# EAGLE board morseovka-panel (EAGLE 9.1.3)
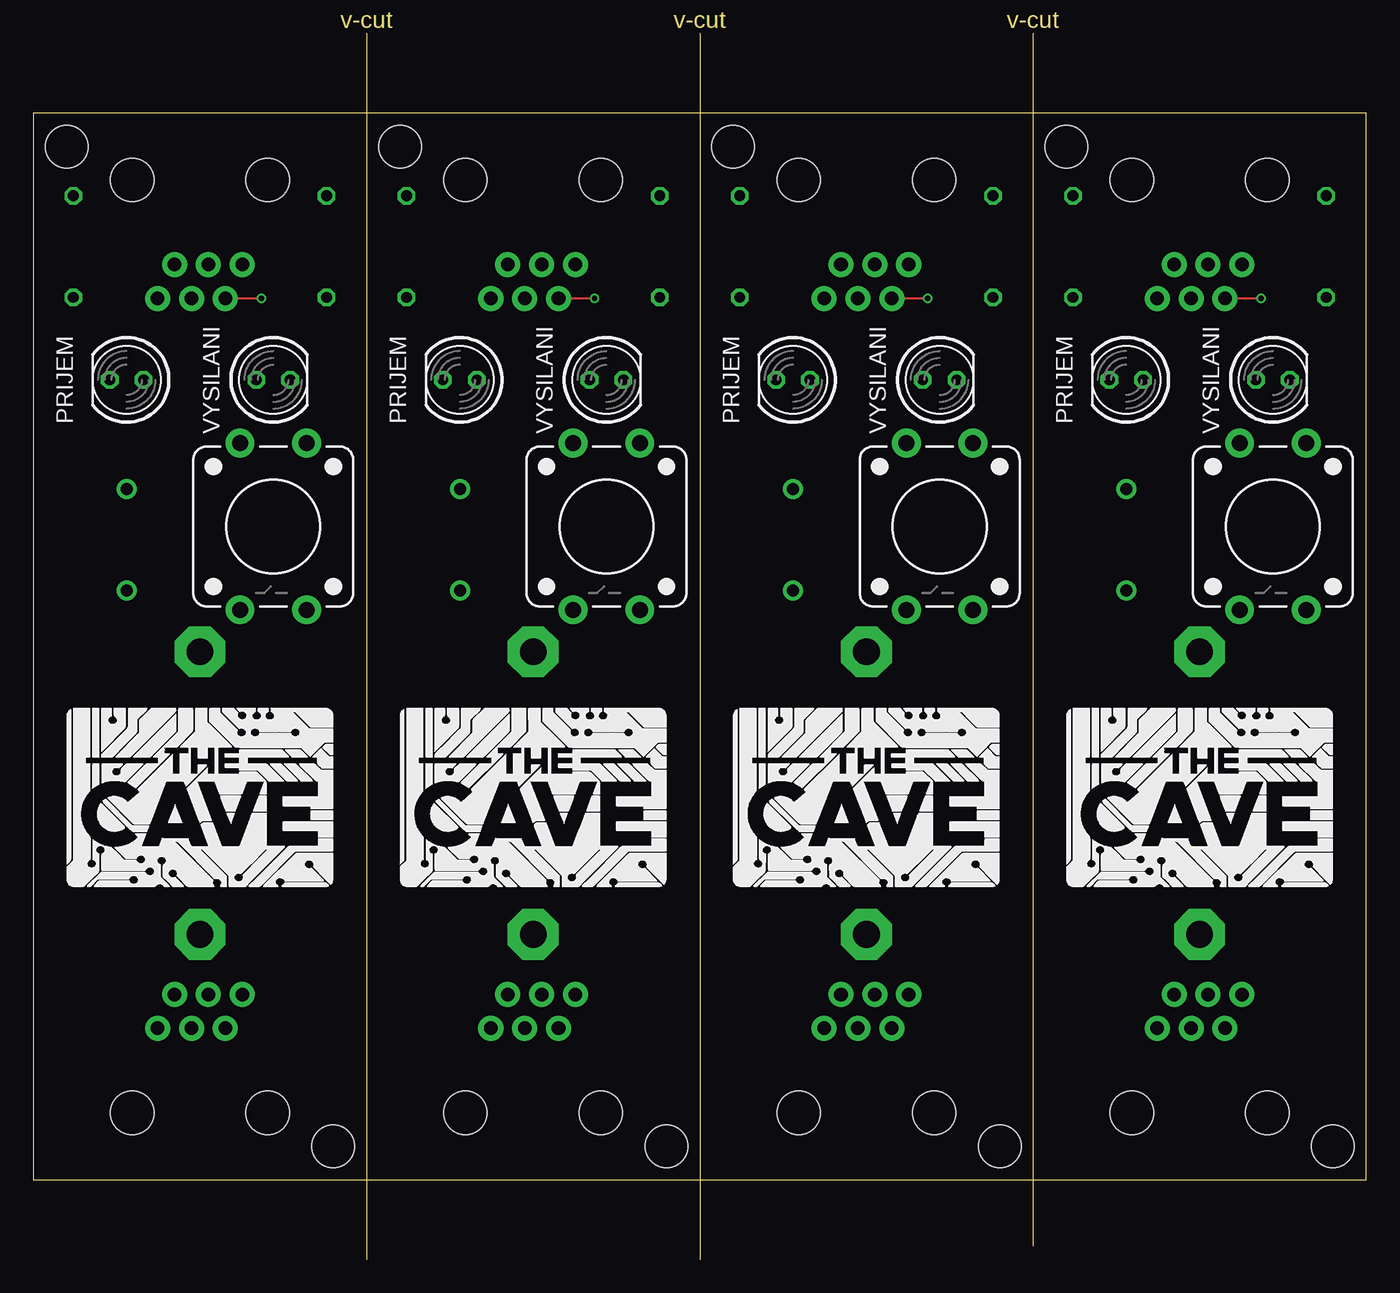
[diagram p0: board, top side]
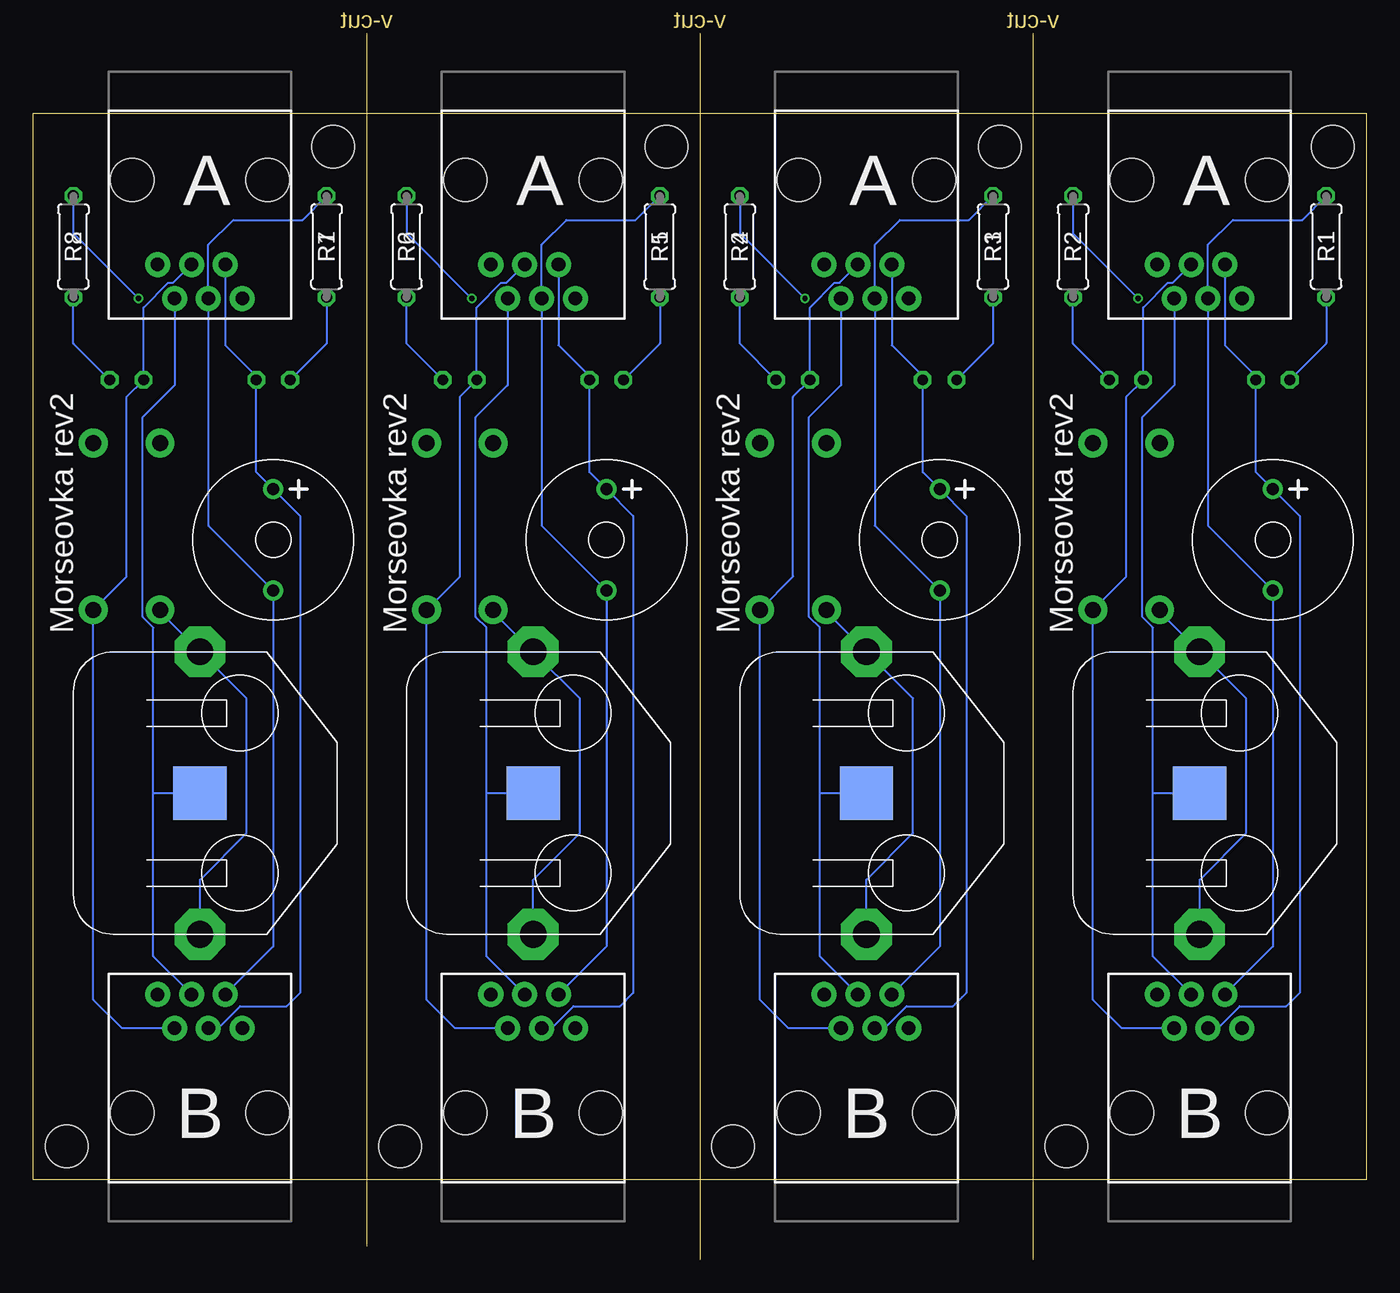
[diagram p1: board, bottom side, seen from below]

Size 100 x 92 mm. Coordinates in mm from the lower left corner, seen from the top.
Outline: 25,92 25,0
Outline: 50,92 50,0
Outline: 75,92 75,1
Outline: 0,86 0,6 25,6 50,6 75,6 100,6 100,86 75,86 50,86 25,86 0,86
Copper layers (1*16): Top 0.035mm / dielectric 1.5mm / Bottom 0.035mm
Design rules "SeeedStudio_2layer_DRU_no_angle_20140221": minimum track width 6mil, minimum drill 12mil, track to track 6mil, track to pad 6mil, pad to pad 6mil, via to via 6mil, smd to smd 0mil, copper to edge 10mil, drill to drill 10mil, minimum pad ring 10mil, minimum via ring 6mil, stop-mask expansion 2mil, vias tented up to drill 100mil, thermal gap 10mil
Holes 3.2 mm at 2.5,83.5 22.5,8.5 27.5,83.5 47.5,8.5 52.5,83.5 72.5,8.5 77.5,83.5 97.5,8.5

## Footprints (pad centres in the part's own frame; a part is rotated, then mirrored left to right if it is on the bottom)
BZ2-7.6-D12.0XH6.5MM = drill 0.9 pad 1.5: + -3.8,0; - 3.8,0
RJ11-6 = drill 1.016 pad 1.88: 1 -3.175,8.89; 2 -1.905,6.35; 3 -0.635,8.89; 4 0.635,6.35; 5 1.905,8.89; 6 3.175,6.35 | hole 3.251: -5.08,0; 5.08,0
LED5MM = drill 0.813 octagon: A -1.27,0; K 1.27,0
0207/7 = drill 0.813 octagon: 1 -3.81,0; 2 3.81,0
TACTILE_SWITCH_PTH_12MM = drill 1.2 pad 2.159: 1 6.25,-2.5; 2 -6.25,-2.5; 3 6.25,2.5; 4 -6.25,2.5
CR2032H = smd 4 x 4: GND 0,0 | drill 2 pad 3.81 octagon: VCC.1 -10.6,0; VCC.2 10.6,0

## Placement (x,y rotation side)
BUZ1  [BZ2-7.6-D12.0XH6.5MM]  7,54 270 bottom
BUZ2  [BZ2-7.6-D12.0XH6.5MM]  32,54 270 bottom
BUZ3  [BZ2-7.6-D12.0XH6.5MM]  57,54 270 bottom
BUZ4  [BZ2-7.6-D12.0XH6.5MM]  82,54 270 bottom
J1  RJ11  [RJ11-6]  12.5,81 180 bottom
J2  RJ11  [RJ11-6]  12.5,11 0 bottom
J3  RJ11  [RJ11-6]  37.5,11 0 bottom
J4  RJ11  [RJ11-6]  37.5,81 180 bottom
J5  RJ11  [RJ11-6]  62.5,11 0 bottom
J6  RJ11  [RJ11-6]  62.5,81 180 bottom
J7  RJ11  [RJ11-6]  87.5,11 0 bottom
J8  RJ11  [RJ11-6]  87.5,81 180 bottom
LED1  PRIJEM  [LED5MM]  7,66 180 top
LED2  VYSILANI  [LED5MM]  18,66 0 top
LED3  PRIJEM  [LED5MM]  32,66 180 top
LED4  VYSILANI  [LED5MM]  43,66 0 top
LED5  PRIJEM  [LED5MM]  57,66 180 top
LED6  VYSILANI  [LED5MM]  68,66 0 top
LED7  PRIJEM  [LED5MM]  82,66 180 top
LED8  VYSILANI  [LED5MM]  93,66 0 top
R1  [0207/7]  3,76 270 bottom
R2  [0207/7]  22,76 270 bottom
R3  [0207/7]  28,76 270 bottom
R4  [0207/7]  47,76 270 bottom
R5  [0207/7]  53,76 270 bottom
R6  [0207/7]  72,76 270 bottom
R7  [0207/7]  78,76 270 bottom
R8  [0207/7]  97,76 270 bottom
S1  [TACTILE_SWITCH_PTH_12MM]  18,55 270 top
S2  [TACTILE_SWITCH_PTH_12MM]  43,55 270 top
S3  [TACTILE_SWITCH_PTH_12MM]  68,55 270 top
S4  [TACTILE_SWITCH_PTH_12MM]  93,55 270 top
U$1  CR2032HSMD  [CR2032H]  12.5,35 90 bottom
U$2  THECAVE_LOGO_NEW_TOP  [NEW_LOGO_TOP]  2.5,28 0 top
U$3  CR2032HSMD  [CR2032H]  37.5,35 90 bottom
U$4  THECAVE_LOGO_NEW_TOP  [NEW_LOGO_TOP]  27.5,28 0 top
U$5  CR2032HSMD  [CR2032H]  62.5,35 90 bottom
U$6  THECAVE_LOGO_NEW_TOP  [NEW_LOGO_TOP]  52.5,28 0 top
U$7  CR2032HSMD  [CR2032H]  87.5,35 90 bottom
U$8  THECAVE_LOGO_NEW_TOP  [NEW_LOGO_TOP]  77.5,28 0 top

## Library data of the parts
BUZ1-BUZ4 = Seeed-Connector; MPN: KS-12065D03YA
J1-J8 = SparkFun-Connectors; PROD_ID: CONN-08590; SF_ID: PRT-00132
LED1-LED8 = led
R1-R8 = rcl
S1-S4 = SparkFun-Switches; PROD_ID: SWCH-09185; SF_SKU: COM-09190
U$1-U$8 = thecave

## Nets
N$1: LED1.K R1.2
N$2: S1.1 U$1.VCC.1 U$1.VCC.2
N$3: LED3.K R3.2
N$4: LED2.K R2.2
N$5: LED4.K R4.2
N$6: S2.1 U$3.VCC.1 U$3.VCC.2
N$7: LED5.K R5.2
N$8: LED6.K R6.2
N$9: S3.1 U$5.VCC.1 U$5.VCC.2
N$10: LED7.K R7.2
N$11: LED8.K R8.2
N$12: S4.1 U$7.VCC.1 U$7.VCC.2
RX+: BUZ1.+ J1.2 J2.4 LED1.A
RX+1: BUZ2.+ J3.4 J4.2 LED3.A
RX+2: BUZ3.+ J5.4 J6.2 LED5.A
RX+3: BUZ4.+ J7.4 J8.2 LED7.A
RX-: BUZ1.- J1.3 J2.5 R1.1
RX-1: BUZ2.- J3.5 J4.3 R3.1
RX-2: BUZ3.- J5.5 J6.3 R5.1
RX-3: BUZ4.- J7.5 J8.3 R7.1
TX+: J1.4 J2.2 LED2.A S1.3
TX+1: J3.2 J4.4 LED4.A S2.3
TX+2: J5.2 J6.4 LED6.A S3.3
TX+3: J7.2 J8.4 LED8.A S4.3
TX-: J1.5 J2.3 R2.1 U$1.GND
TX-1: J3.3 J4.5 R4.1 U$3.GND
TX-2: J5.3 J6.5 R6.1 U$5.GND
TX-3: J7.3 J8.5 R8.1 U$7.GND

## Tracks (layer width: path | path; a pad name or v marks a point on that pad's centre or on a via)
N$1
  Bottom 0.152: R1.2 3,68.73 LED1.K
N$2
  Bottom 0.152: S1.1 15.5,48.6 U$1.VCC.2 9,42.1 9,32 12.5,28.5 U$1.VCC.1
N$3
  Bottom 0.152: R3.2 28,68.73 LED3.K
N$4
  Bottom 0.152: LED2.K 22,68.73 R2.2
N$5
  Bottom 0.152: LED4.K 47,68.73 R4.2
N$6
  Bottom 0.152: S2.1 40.5,48.6 U$3.VCC.2 34,42.1 34,32 37.5,28.5 U$3.VCC.1
N$7
  Bottom 0.152: R5.2 53,68.73 LED5.K
N$8
  Bottom 0.152: LED6.K 72,68.73 R6.2
N$9
  Bottom 0.152: S3.1 65.5,48.6 U$5.VCC.2 59,42.1 59,32 62.5,28.5 U$5.VCC.1
N$10
  Bottom 0.152: R7.2 78,68.73 LED7.K
N$11
  Bottom 0.152: LED8.K 97,68.73 R8.2
N$12
  Bottom 0.152: S4.1 90.5,48.6 U$7.VCC.2 84,42.1 84,32 87.5,28.5 U$7.VCC.1
RX+
  Bottom 0.152: J1.2 10.6,68.59 8.27,66.27 LED1.A 8.27,59.07 BUZ1.+ 5,55.8 5,20 6,19 9.49,19 11.14,17.35 J2.4
RX+1
  Bottom 0.152: J4.2 35.59,68.59 33.27,66.27 LED3.A 33.27,59.07 BUZ2.+ 30,55.8 30,20 31,19 34.49,19 36.14,17.35 J3.4
RX+2
  Bottom 0.152: J6.2 60.59,68.59 58.27,66.27 LED5.A 58.27,59.07 BUZ3.+ 55,55.8 55,20 56,19 59.49,19 61.14,17.35 J5.4
RX+3
  Bottom 0.152: J8.2 85.59,68.59 83.27,66.27 LED7.A 83.27,59.07 BUZ4.+ 80,55.8 80,20 81,19 84.49,19 86.14,17.35 J7.4
RX-
  Bottom 0.152: J2.5 7,23.48 BUZ1.- 11.87,55.06 J1.3 11.87,76.14 10,78 4.81,78 R1.1
RX-1
  Bottom 0.152: J3.5 32,23.48 BUZ2.- 36.87,55.06 J4.3 36.87,76.14 35,78 29.81,78 R3.1
RX-2
  Bottom 0.152: J5.5 57,23.48 BUZ3.- 61.87,55.06 J6.3 61.87,76.14 60,78 54.81,78 R5.1
RX-3
  Bottom 0.152: J7.5 82,23.48 BUZ4.- 86.86,55.06 J8.3 86.86,76.14 85,78 79.81,78 R7.1
TX+
  Bottom 0.152: J2.2 18.35,17.35 20.5,19.5 S1.3 18,51.25 18,64.73 LED2.A 16.73,71.44 14.89,73.28 14.51,73.28 J1.4
TX+1
  Bottom 0.152: J3.2 43.35,17.35 45.5,19.5 S2.3 43,51.25 43,64.73 LED4.A 41.73,71.44 39.89,73.28 39.51,73.28 J4.4
TX+2
  Bottom 0.152: J5.2 68.35,17.35 70.5,19.5 S3.3 68,51.25 68,64.73 LED6.A 66.73,71.44 64.89,73.28 64.51,73.28 J6.4
TX+3
  Bottom 0.152: J7.2 93.35,17.35 95.5,19.5 S4.3 93,51.25 93,64.73 LED8.A 91.73,71.44 89.89,73.28 89.51,73.28 J8.4
TX-  (via drill 0.4)
  Top 0.152: v17.11,72.11 J1.5
  Bottom 0.152: J2.3 16,22.75 16,35 | 16,35 U$1.GND | 16,35 16,47.4 16.81,48.21 16.81,63.19 14.4,65.59 J1.5 | R2.1 22,77 v17.11,72.11
TX-1  (via drill 0.4)
  Top 0.152: v42.11,72.11 J4.5
  Bottom 0.152: J3.3 41,22.75 41,35 | 41,35 U$3.GND | 41,35 41,47.4 41.81,48.21 41.81,63.19 39.41,65.59 J4.5 | R4.1 47,77 v42.11,72.11
TX-2  (via drill 0.4)
  Top 0.152: v67.11,72.11 J6.5
  Bottom 0.152: J5.3 66,22.75 66,35 | 66,35 U$5.GND | 66,35 66,47.4 66.81,48.21 66.81,63.19 64.41,65.59 J6.5 | R6.1 72,77 v67.11,72.11
TX-3  (via drill 0.4)
  Top 0.152: v92.11,72.11 J8.5
  Bottom 0.152: J7.3 91,22.75 91,35 | 91,35 U$7.GND | 91,35 91,47.4 91.81,48.21 91.81,63.19 89.41,65.59 J8.5 | R8.1 97,77 v92.11,72.11

## Text on the board
Dimension: v-cut | v-cut | v-cut
bPlace: A | A | A | A | Morseovka rev2 | Morseovka rev2 | Morseovka rev2 | Morseovka rev2 | B | B | B | B
_bNames: R1 | R2 | R1 | R2 | R1 | R2 | R1 | R2